# EAGLE board LM4811 Audio Amp (EAGLE 9.2.2)

Size 160 x 100 mm. Coordinates in mm from the lower left corner, seen from the top.
Outline: 0,0 160,0 160,100 0,100 0,0
Copper layers (1*16): Top 0.035mm / dielectric 1.5mm / Bottom 0.035mm
Design rules "default": minimum track width 6mil, minimum drill 0.35mm, track to track 6mil, track to pad 6mil, pad to pad 6mil, via to via 6mil, smd to smd 6mil, copper to edge 40mil, drill to drill 6mil, minimum pad ring 10mil, minimum via ring 8mil, stop-mask expansion 4mil, vias tented up to drill 0mil, thermal gap 10mil

## Footprints (pad centres in the part's own frame; a part is rotated, then mirrored left to right if it is on the bottom)
C0805K = smd 1.3 x 1.6: 1 -1,0; 2 1,0
SWITCHCRAFT_35RAPC4BHN2 = drill 0.6 pad 1.3 long: 1 0,-1; 2 5,4; 3 -5,4; 10 2.5,4; 11 -2.5,4 | hole 1.2: 0,4; -5,-1; -5,-3.5; 5,-1; 5,-3.5
R0805 = smd 1.3 x 1.5: 1 -0.95,0; 2 0.95,0
MUB10A-M = smd 1.676 x 0.33: 1 -2.248,1; 2 -2.248,0.5; 3 -2.248,0; 4 -2.248,-0.5; 5 -2.248,-1; 6 2.248,-1; 7 2.248,-0.5; 8 2.248,0; 9 2.248,0.5; 10 2.248,1

## Placement (x,y rotation side)
C1  [C0805K]  16.51,35.56 0 top
C2  [C0805K]  12.7,35.56 0 top
C3  [C0805K]  8.89,35.56 0 top
C4  [C0805K]  25.4,40.64 0 top
J1  35RAPC4BHN2  [SWITCHCRAFT_35RAPC4BHN2]  20.32,17.78 0 top
R1  [R0805]  17.78,29.21 0 top
R2  [R0805]  12.7,29.21 0 top
R3  [R0805]  25.4,35.56 0 top
R4  [R0805]  20.32,35.56 0 top
U1  LM4811MM/NOPBMUB10A-M  [MUB10A-M]  24.13,30.48 0 top

## Library data of the parts
C1-C4 = rcl; SPICEPREFIX: C
J1 = 35RAPC4BHN2; DESCRIPTION: Conn 3.5MM Stereo Jack F 5 POS Solder RA Thru-Hole 5 Terminal 1 Port; DIGI-KEY_PART_NUMBER: SC1459-ND; DIGI-KEY_PURCHASE_URL: https://www.digikey.com/product-detail/en/switchcraft-inc/35RAPC4BHN2/SC1459-ND/1288690?utm_source=snapeda&utm_medium=aggregator&utm_campaign=symbol; MF: Switchcraft; MP: 35RAPC4BHN2; PACKAGE: None
R1-R4 = rcl; SPICEPREFIX: R
U1 = LM4811MM; MANUFACTURER_PART_NUMBER: LM4811MMNOPB; VENDOR: Texas Instruments

## Nets
+5V: U1.10
GND: C1.2 C2.2 J1.1 R3.1 R4.1 U1.5
LFILTERED: C3.2 U1.2
LPWM: R1.1
N$1: C1.1 C3.1 R1.2 R3.2
N$2: C2.1 C4.1 R2.2 R4.2
N$3: J1.2 U1.1
N$4: J1.3 U1.9
RFILTERED: C4.2 U1.8
RPWM: R2.1

## Tracks (layer width: path | path; a pad name or v marks a point on that pad's centre or on a via)
GND  (5 unrouted)
LFILTERED  (1 unrouted)
N$1  (3 unrouted)
N$2  (3 unrouted)
N$3  (1 unrouted)
N$4  (1 unrouted)
RFILTERED  (1 unrouted)